# EAGLE board shiftmodule (EAGLE 6.3)
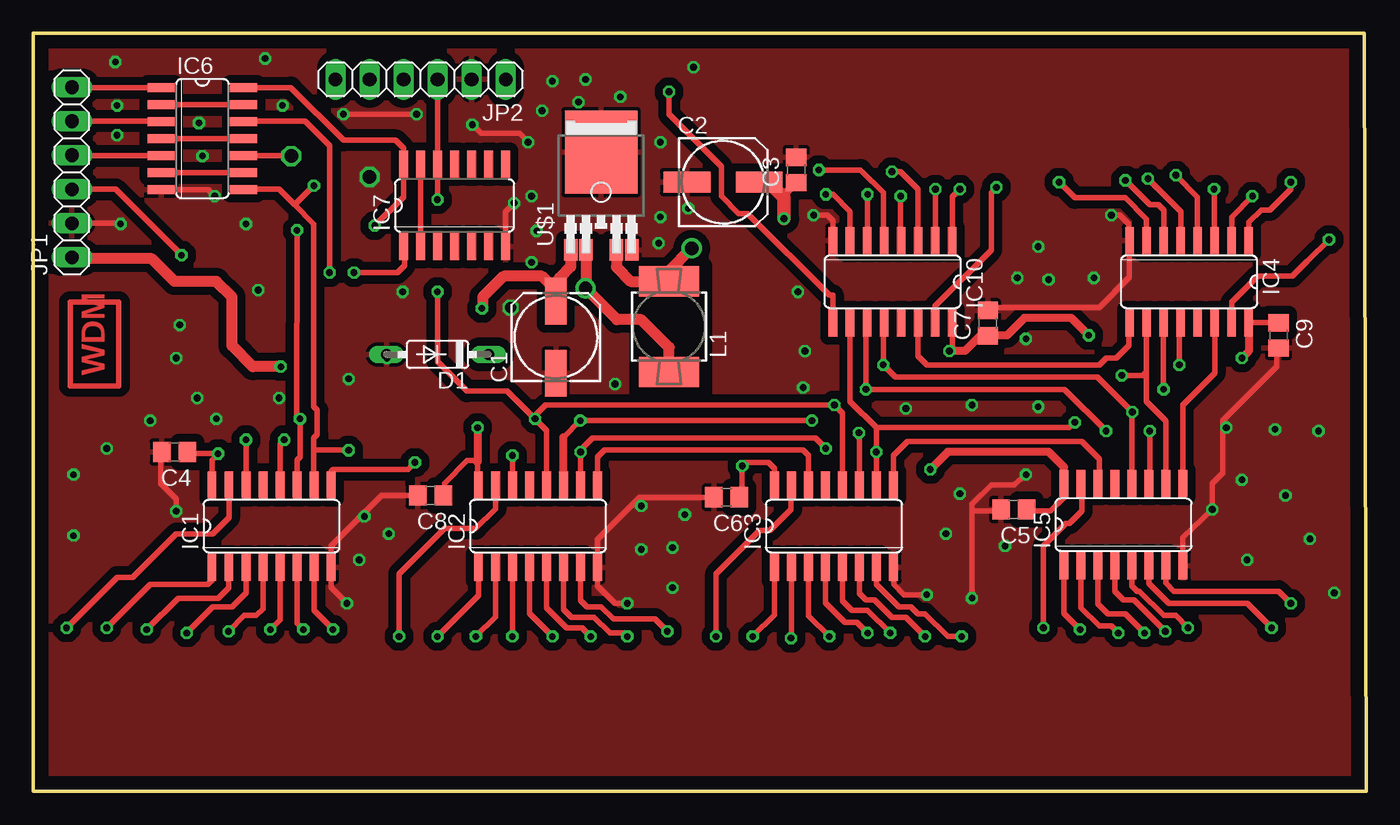
[diagram p0: board, top side]
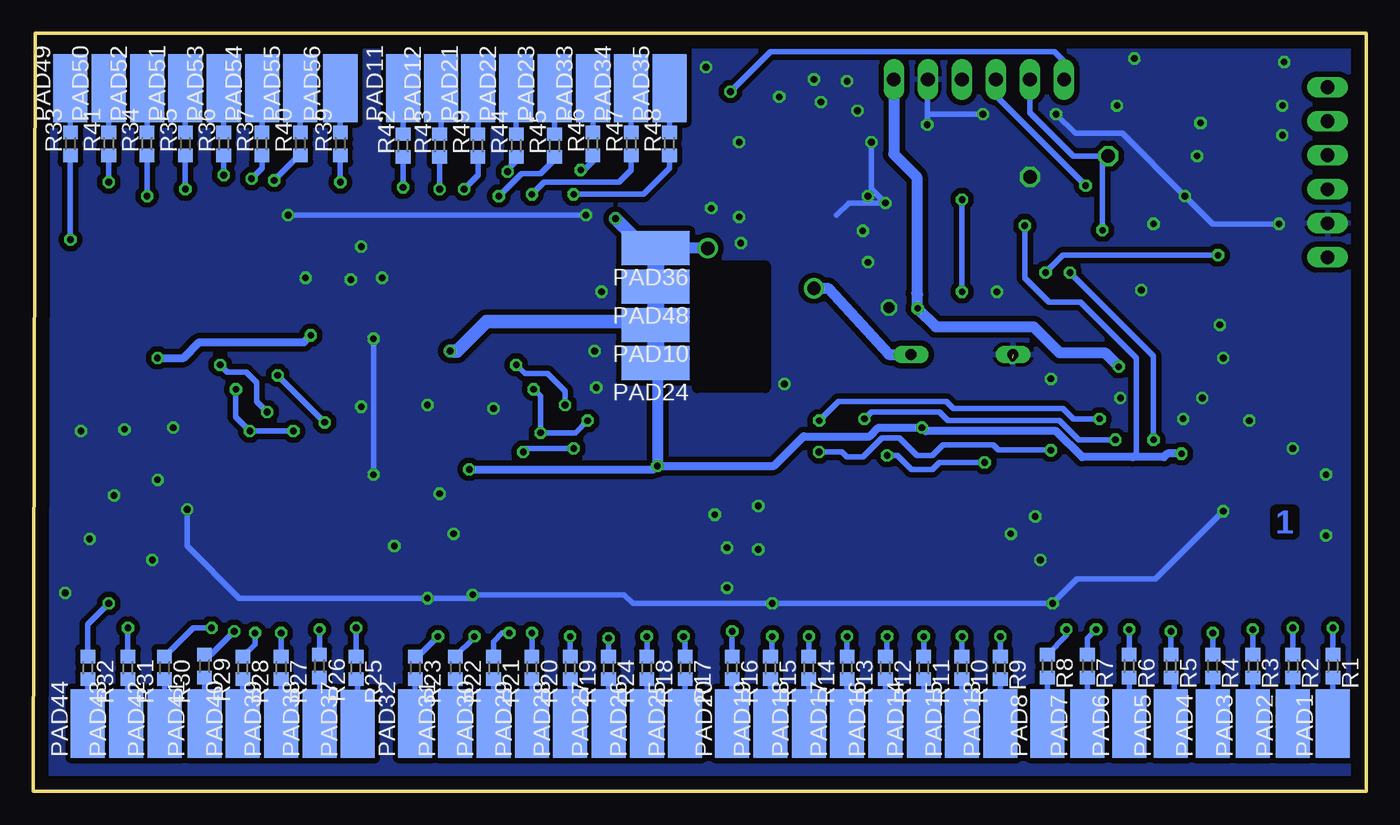
[diagram p1: board, bottom side, seen from below]

Size 99.48 x 56.6 mm. Coordinates in mm from the lower left corner, seen from the top.
Outline: 0,0 99.48,0 99.35,56.6 0,56.6 0,0
Copper layers (1*16): Top 0.035mm / dielectric 1.5mm / Bottom 0.035mm
Design rules "default *": minimum track width 10mil, minimum drill 24mil, track to track 8mil, track to pad 8mil, pad to pad 8mil, via to via 8mil, smd to smd 8mil, copper to edge 40mil, drill to drill 8mil, minimum pad ring 10mil, minimum via ring 8mil, stop-mask expansion 4mil, vias tented up to drill 20mil, thermal gap 10mil
tRestrict: area 45.1,30 to 50.1,39.3
bRestrict: area 44.9,30.2 to 49.9,39.3

## Footprints (pad centres in the part's own frame; a part is rotated, then mirrored left to right if it is on the bottom)
153CLV-0605 = smd 3.5 x 1.6: + 2.7,0; - -2.7,0
C0805 = smd 1.3 x 1.5: 1 -0.95,0; 2 0.95,0
DO35-7 = drill 0.813 long: A 3.81,0; C -3.81,0
SO16 = smd 0.66 x 2.032: 1 -4.445,-3.073; 2 -3.175,-3.073; 3 -1.905,-3.073; 4 -0.635,-3.073; 5 0.635,-3.073; 6 1.905,-3.073; 7 3.175,-3.073; 8 4.445,-3.073; 9 4.445,3.073; 10 3.175,3.073; 11 1.905,3.073; 12 0.635,3.073; 13 -0.635,3.073; 14 -1.905,3.073; 15 -3.175,3.073; 16 -4.445,3.073
SO14 = smd 0.66 x 2.032: 1 -3.81,-3.073; 2 -2.54,-3.073; 3 -1.27,-3.073; 4 0,-3.073; 5 1.27,-3.073; 6 2.54,-3.073; 7 3.81,-3.073; 8 3.81,3.073; 9 2.54,3.073; 10 1.27,3.073; 11 0,3.073; 12 -1.27,3.073; 13 -2.54,3.073; 14 -3.81,3.073
1X06 = drill 1.016 long: 1 -6.35,0; 2 -3.81,0; 3 -1.27,0; 4 1.27,0; 5 3.81,0; 6 6.35,0
MS85 = smd 4.5 x 2.25: 1 0,-3.383; 2 0,3.383
SMD2,54-5,08 = smd 2.54 x 5.08: 1 0,0
R0603 = smd 1 x 1.1: 1 -0.85,0; 2 0.85,0
TO252-5-11 = smd 1 x 1.6: 1 -2.28,-4.8; 2 -1.14,-4.8; 4 1.14,-4.8; 5 2.28,-4.8 | smd 5.4 x 6.2: 3 0,2.5

## Placement (x,y rotation side)
C1  [153CLV-0605]  39,33.93 90 top
C2  [153CLV-0605]  51.48,45.5 0 top
C3  [C0805]  56.94,46.41 90 top
C4  [C0805]  10.53,25.35 180 top
C5  [C0805]  73.19,21.06 180 top
C6  [C0805]  51.74,21.97 180 top
C7  [C0805]  71.24,34.97 90 top
C8  [C0805]  29.64,22.1 180 top
C9  [C0805]  92.95,34.06 270 top
D1  1N4148DO35-7  [DO35-7]  30.16,32.63 180 top
IC1  74LS595D  [SO16]  17.77,19.82 0 top
IC2  74LS595D  [SO16]  37.66,19.82 0 top
IC3  74LS595D  [SO16]  59.76,19.82 0 top
IC4  74LS595D  [SO16]  86.27,38.06 180 top
IC5  74LS595D  [SO16]  81.37,19.92 0 top
IC6  74HC04D  [SO14]  12.61,48.75 270 top
IC7  74HC04D  [SO14]  31.43,43.76 0 top
IC10  74LS595D  [SO16]  64.14,38.06 180 top
JP1  [1X06]  2.87,46.24 90 top
JP2  [1X06]  28.9,53.18 180 top
L1  [MS85]  47.45,34.71 0 top
PAD1  [SMD2,54-5,08]  2.47,5.07 0 bottom
PAD2  [SMD2,54-5,08]  5.46,5.07 0 bottom
PAD3  [SMD2,54-5,08]  8.45,5.07 0 bottom
PAD4  [SMD2,54-5,08]  11.44,5.07 0 bottom
PAD5  [SMD2,54-5,08]  14.56,5.07 0 bottom
PAD6  [SMD2,54-5,08]  17.68,5.07 0 bottom
PAD7  [SMD2,54-5,08]  20.8,5.07 0 bottom
PAD8  [SMD2,54-5,08]  23.79,5.07 0 bottom
PAD10  [SMD2,54-5,08]  53.04,34.84 90 bottom
PAD11  [SMD2,54-5,08]  71.89,52.52 0 bottom
PAD12  [SMD2,54-5,08]  69.06,52.5 0 bottom
PAD13  [SMD2,54-5,08]  27.3,5.07 0 bottom
PAD14  [SMD2,54-5,08]  33.02,5.07 0 bottom
PAD15  [SMD2,54-5,08]  30.16,5.07 0 bottom
PAD16  [SMD2,54-5,08]  35.88,5.07 0 bottom
PAD17  [SMD2,54-5,08]  38.74,5.07 0 bottom
PAD18  [SMD2,54-5,08]  41.6,5.07 0 bottom
PAD19  [SMD2,54-5,08]  44.46,5.07 0 bottom
PAD20  [SMD2,54-5,08]  47.32,5.07 0 bottom
PAD21  [SMD2,54-5,08]  66.3,52.52 0 bottom
PAD22  [SMD2,54-5,08]  63.44,52.52 0 bottom
PAD23  [SMD2,54-5,08]  60.58,52.52 0 bottom
PAD24  [SMD2,54-5,08]  53.04,31.98 90 bottom
PAD25  [SMD2,54-5,08]  50.83,5.07 0 bottom
PAD26  [SMD2,54-5,08]  53.69,5.07 0 bottom
PAD27  [SMD2,54-5,08]  56.55,5.07 0 bottom
PAD28  [SMD2,54-5,08]  59.41,5.07 0 bottom
PAD29  [SMD2,54-5,08]  62.27,5.07 0 bottom
PAD30  [SMD2,54-5,08]  65.13,5.07 0 bottom
PAD31  [SMD2,54-5,08]  67.99,5.07 0 bottom
PAD32  [SMD2,54-5,08]  70.98,5.07 0 bottom
PAD33  [SMD2,54-5,08]  57.72,52.52 0 bottom
PAD34  [SMD2,54-5,08]  54.86,52.52 0 bottom
PAD35  [SMD2,54-5,08]  52,52.52 0 bottom
PAD36  [SMD2,54-5,08]  53.04,40.56 90 bottom
PAD37  [SMD2,54-5,08]  75.29,5.05 0 bottom
PAD38  [SMD2,54-5,08]  78.13,5.07 0 bottom
PAD39  [SMD2,54-5,08]  80.99,5.07 0 bottom
PAD40  [SMD2,54-5,08]  83.85,5.07 0 bottom
PAD41  [SMD2,54-5,08]  86.71,5.07 0 bottom
PAD42  [SMD2,54-5,08]  89.7,5.07 0 bottom
PAD43  [SMD2,54-5,08]  92.56,5.07 0 bottom
PAD44  [SMD2,54-5,08]  95.42,5.07 0 bottom
PAD48  [SMD2,54-5,08]  53.04,37.7 90 bottom
PAD49  [SMD2,54-5,08]  96.72,52.52 0 bottom
PAD50  [SMD2,54-5,08]  93.86,52.52 0 bottom
PAD51  [SMD2,54-5,08]  88.14,52.52 0 bottom
PAD52  [SMD2,54-5,08]  91,52.52 0 bottom
PAD53  [SMD2,54-5,08]  85.28,52.52 0 bottom
PAD54  [SMD2,54-5,08]  82.42,52.52 0 bottom
PAD55  [SMD2,54-5,08]  79.56,52.52 0 bottom
PAD56  [SMD2,54-5,08]  76.57,52.52 0 bottom
R1  [R0603]  2.47,9.36 270 bottom
R2  [R0603]  5.46,9.36 270 bottom
R3  [R0603]  8.45,9.36 270 bottom
R4  [R0603]  11.44,9.36 270 bottom
R5  [R0603]  14.56,9.36 270 bottom
R6  [R0603]  17.68,9.36 270 bottom
R7  [R0603]  20.8,9.36 270 bottom
R8  [R0603]  23.79,9.36 270 bottom
R9  [R0603]  27.3,9.23 270 bottom
R10  [R0603]  30.16,9.23 270 bottom
R11  [R0603]  33.02,9.23 270 bottom
R12  [R0603]  35.88,9.23 270 bottom
R13  [R0603]  38.74,9.23 270 bottom
R14  [R0603]  41.6,9.23 270 bottom
R15  [R0603]  44.46,9.23 270 bottom
R16  [R0603]  47.32,9.23 270 bottom
R17  [R0603]  50.83,9.23 270 bottom
R18  [R0603]  53.69,9.23 270 bottom
R19  [R0603]  59.41,9.23 270 bottom
R20  [R0603]  62.27,9.23 270 bottom
R21  [R0603]  65.13,9.23 270 bottom
R22  [R0603]  67.99,9.23 270 bottom
R23  [R0603]  70.98,9.23 270 bottom
R24  [R0603]  56.55,9.23 270 bottom
R25  [R0603]  75.4,9.23 270 bottom
R26  [R0603]  78.13,9.36 270 bottom
R27  [R0603]  80.99,9.23 270 bottom
R28  [R0603]  83.85,9.23 270 bottom
R29  [R0603]  86.71,9.36 270 bottom
R30  [R0603]  89.7,9.23 270 bottom
R31  [R0603]  92.43,9.23 270 bottom
R32  [R0603]  95.42,9.23 270 bottom
R33  [R0603]  96.72,48.36 90 bottom
R34  [R0603]  91,48.36 90 bottom
R35  [R0603]  88.14,48.36 90 bottom
R36  [R0603]  85.28,48.36 90 bottom
R37  [R0603]  82.42,48.36 90 bottom
R39  [R0603]  76.57,48.36 90 bottom
R40  [R0603]  79.56,48.36 90 bottom
R41  [R0603]  93.86,48.36 90 bottom
R42  [R0603]  71.89,48.23 90 bottom
R43  [R0603]  69.16,48.23 90 bottom
R44  [R0603]  63.44,48.23 90 bottom
R45  [R0603]  60.58,48.23 90 bottom
R46  [R0603]  57.72,48.36 90 bottom
R47  [R0603]  54.86,48.36 90 bottom
R48  [R0603]  52,48.36 90 bottom
R49  [R0603]  66.3,48.23 90 bottom
U$1  AP1507  [TO252-5-11]  42.38,45.24 0 top

## Library data of the parts
C1-C9 R1-R37 R39-R49 = rcl
D1 = diode
IC1-IC5 IC10 = 74xx-us
IC6 IC7 = 74xx-eu
JP1 JP2 = pinhead
L1 = inductor-neosid; OC_FARNELL: unknown; OC_NEWARK: unknown
PAD1-PAD8 PAD10-PAD44 PAD48-PAD56 = wirepad
U$1 = misc

## Nets
GND: C1.- C2.- C3.2 C4.2 C5.2 C6.2 C7.2 C8.2 C9.2 D1.A IC1.8 IC2.8 IC3.8 IC4.8 IC5.8 IC6.7 IC7.7 IC10.8 JP1.2 JP2.2 U$1.3 U$1.5
N$1: IC6.2 IC6.13
N$2: IC2.9 IC3.14
N$3: IC3.9 IC5.14
N$4: IC10.9 JP2.6
N$5: IC6.4 IC6.11
N$6: IC6.6 IC6.9
N$7: IC6.1 JP1.6
N$8: IC6.3 JP1.5
N$9: IC6.5 JP1.4
N$10: IC7.1 JP1.3
N$12: PAD1.1 R1.2
N$13: PAD2.1 R2.2
N$14: PAD3.1 R3.2
N$15: IC4.14 IC5.9
N$16: PAD4.1 R4.2
N$17: PAD5.1 R5.2
N$18: PAD6.1 R6.2
N$19: PAD7.1 R7.2
N$20: PAD8.1 R8.2
N$21: PAD13.1 R9.2
N$22: PAD15.1 R10.2
N$23: PAD14.1 R11.2
N$24: PAD16.1 R12.2
N$25: PAD17.1 R13.2
N$26: PAD18.1 R14.2
N$27: PAD19.1 R15.2
N$28: PAD20.1 R16.2
N$29: PAD25.1 R17.2
N$30: PAD26.1 R18.2
N$31: PAD28.1 R19.2
N$32: PAD29.1 R20.2
N$33: PAD30.1 R21.2
N$34: PAD31.1 R22.2
N$35: PAD32.1 R23.2
N$36: PAD27.1 R24.2
N$37: PAD37.1 R25.2
N$38: PAD38.1 R26.2
N$39: PAD39.1 R27.2
N$40: PAD40.1 R28.2
N$41: PAD41.1 R29.2
N$42: PAD42.1 R30.2
N$43: PAD43.1 R31.2
N$44: PAD44.1 R32.2
N$45: PAD49.1 R33.2
N$46: PAD52.1 R34.2
N$47: PAD51.1 R35.2
N$48: PAD53.1 R36.2
N$49: PAD54.1 R37.2
N$50: PAD56.1 R39.2
N$51: PAD55.1 R40.2
N$52: PAD50.1 R41.2
N$53: IC1.9 IC2.14
N$54: IC7.2 IC7.13
N$55: IC4.9 IC10.14
N$56: PAD11.1 R42.2
N$57: PAD12.1 R43.2
N$58: PAD22.1 R44.2
N$59: PAD23.1 R45.2
N$60: PAD33.1 R46.2
N$61: PAD34.1 R47.2
N$62: PAD35.1 R48.2
N$63: PAD21.1 R49.2
N$64: D1.C L1.1 U$1.2
N$65: IC4.7 R39.1
N$66: IC4.5 R37.1
N$67: IC4.6 R40.1
N$68: IC4.4 R36.1
N$69: IC4.3 R35.1
N$70: IC4.2 R34.1
N$71: IC4.1 R41.1
N$72: IC4.15 R33.1
N$73: IC10.15 R42.1
N$74: IC10.1 R43.1
N$75: IC10.2 R49.1
N$76: IC10.3 R44.1
N$77: IC10.4 R45.1
N$78: IC10.5 R46.1
N$79: IC10.6 R47.1
N$80: IC10.7 R48.1
N$81: IC5.7 R32.1
N$82: IC5.6 R31.1
N$83: IC5.5 R30.1
N$84: IC5.4 R29.1
N$85: IC5.3 R28.1
N$86: IC5.2 R27.1
N$87: IC5.1 R26.1
N$88: IC5.15 R25.1
N$89: IC3.7 R23.1
N$90: IC3.6 R22.1
N$91: IC3.5 R21.1
N$92: IC3.4 R20.1
N$93: IC3.3 R19.1
N$94: IC3.2 R24.1
N$95: IC3.1 R18.1
N$96: IC3.15 R17.1
N$97: IC2.7 R16.1
N$98: IC2.6 R15.1
N$99: IC2.5 R14.1
N$100: IC2.4 R13.1
N$101: IC2.3 R12.1
N$102: IC2.2 R11.1
N$103: IC2.1 R10.1
N$104: IC2.15 R9.1
N$105: IC1.15 R1.1
N$106: IC1.1 R2.1
N$107: IC1.7 R8.1
N$108: IC1.6 R7.1
N$109: IC1.5 R6.1
N$110: IC1.4 R5.1
N$111: IC1.3 R4.1
N$112: IC1.2 R3.1
RCK: IC1.12 IC2.12 IC3.12 IC4.12 IC5.12 IC7.12 IC10.12 JP2.3
SCK: IC1.11 IC2.11 IC3.11 IC4.11 IC5.11 IC6.10 IC10.11 JP2.5
SCL: IC1.10 IC2.10 IC3.10 IC4.10 IC5.10 IC6.8 IC10.10 JP2.4
SER: IC1.14 IC6.12
VCC: C2.+ C3.1 C4.1 C5.1 C6.1 C7.1 C8.1 C9.1 IC1.16 IC2.16 IC3.16 IC4.16 IC5.16 IC6.14 IC7.14 IC10.16 L1.2 PAD10.1 PAD24.1 PAD36.1 PAD48.1 U$1.4
VIN: C1.+ JP1.1 JP2.1 U$1.1

## Tracks (layer width: path | path; a pad name or v marks a point on that pad's centre or on a via)
GND  (via drill 0.5, 0.8, 1)  (1 unrouted)
  Top 0.406: v23.4,14.04 22.21,15.22 IC1.8 22.23,16.76 22.23,18.33 26,22.1 C8.2 | v44.33,14.04 43.42,14.04 42.12,15.34 42.12,16.73 IC2.8 42.11,18.84 45.24,21.97 C6.2 | v66.69,14.69 65,14.69 64.22,15.47 64.22,16.73 IC3.8 | IC5.8 85.81,18.96 v88.01,21.06 88.01,23.01 88.79,23.79 88.79,27.69 92.82,31.72 92.82,32.98 C9.2 | IC10.8 59.7,42.62 59.28,43.03 v58.24,43.03 | v80.47,43.03 81.12,43.03 81.77,42.38 81.77,41.19 IC4.8 81.82,38.41 79.56,36.14 71.46,36.14 C7.2 | IC7.7 35.24,43.3 v35.88,43.94 | v23.14,50.57 v28.6,50.57 | IC6.7 13.04,44.94 v13.52,44.46 | v74.1,23.66 73.19,22.88 71.5,22.88 70.07,21.45 70.07,20.93 | 70.07,20.93 v70.07,14.43 | C5.2 72.11,20.93 70.07,20.93 | C4.2 9.49,25.26 9.49,23.01 10.66,21.84 v10.66,20.93 | JP1.2 6.45,42.43 v6.5,42.38 | v32.76,49.79 33.41,49.14 36.27,49.14 v36.92,48.49
  Bottom 0.406: v88.01,21.06 88.01,18.33 84.11,14.43 v70.07,14.43 66.95,14.43 v66.69,14.69 55.38,14.69 54.73,14.04 v44.33,14.04 v23.4,14.04 21.58,15.86 15.73,15.86 v10.66,20.93 | v58.24,43.03 v80.47,43.03 | 39.52,43.03 38.61,43.94 v35.88,43.94 | v32.76,49.79 32.76,50.57 | 32.76,50.57 32.76,52.52 32.63,52.65 32.63,53.1 JP2.2 | v23.14,50.57 21.71,49.14 18.2,49.14 v13.52,44.46 11.44,42.38 v6.5,42.38 | v28.6,50.57 32.76,50.57 | v74.1,33.8 v74.1,23.66 | v36.92,48.49 36.92,44.98 36.01,44.07
  other vias: 27.56,37.31 17.29,54.73 25.09,45.89 35.62,36.14 13.65,27.82 2.99,19.11 93.47,22.1 79.17,38.35 48.88,43.55 41.21,53.17 70.07,28.86 10.66,32.37 26.39,32.37 37.18,44.46 37.96,50.83 43.81,51.87 46.8,48.49 46.8,42.9 57.46,30.16 57.59,32.89 57.07,37.31 43.42,30.42 37.18,39.52 49.27,54.08 40.69,51.48 38.74,53.04 37.57,41.86 46.67,40.95 75.01,40.69 73.45,38.35 75.79,38.22 95.94,26.91 92.69,27.04 90.22,23.27 89.05,27.17 95.29,18.85 97.11,14.82 90.61,17.29 72.54,18.33 68.12,19.24 69.16,22.23 45.37,21.32 48.62,20.67 47.71,18.2 45.37,18.07 47.71,15.21 26.52,19.24 24.7,20.54 24.31,17.29 2.99,23.66 5.46,25.61 8.71,27.69 12.22,29.38 10.92,34.84 16.77,37.44 15.86,42.38 6.11,54.47 6.24,51.22 6.24,49.01 12.35,49.92 12.61,47.45 18.59,51.22 23.53,30.81 18.33,29.38 75.01,28.73 65.13,28.6
  pour Top (isolate 0.61): -6.89,59.41 109.2,59.41 109.2,-1.04 -7.15,-1.17 -7.02,57.33
  pour Bottom (isolate 0.406): -0.65,64.09 99.19,64.09 99.71,-7.8 -0.13,-7.8
N$1
  Top 0.406: IC6.2 IC6.13
N$2
  Top 0.406: IC3.14 57.86,25.09 57.46,25.48 42.64,25.48 42.12,24.96 42.12,22.91 IC2.9
N$3
  Top 0.406: IC3.9 64.2,25.07 65.26,26.13 78.26,26.13 79.56,24.83 79.56,23.09 IC5.14
N$4  (via drill 0.5)
  Top 0.406: v47.45,52.26 47.45,50.57 51.35,46.67 51.35,44.46 52.65,43.16 53.3,43.16 59.41,37.05 59.67,37.05 59.67,35.01 IC10.9
  Bottom 0.406: JP2.6 22.55,54.53 23.27,55.25 44.46,55.25 v47.45,52.26
N$5
  Top 0.406: IC6.11 IC6.4
N$6
  Top 0.406: IC6.6 IC6.9
N$7
  Top 0.406: JP1.6 2.9,52.56 IC6.1
N$8
  Top 0.406: IC6.3 9.51,50.05 JP1.5
N$9
  Top 0.406: JP1.4 2.9,47.48 IC6.5
N$10  (via drill 0.5)
  Top 0.406: JP1.3 6.12,44.97 v11.05,40.04 | v23.92,38.74 27.17,38.74 27.69,39.26 27.69,40.62 IC7.1
  Bottom 0.406: v11.05,40.04 22.62,40.04 v23.92,38.74
N$11
  Top 0.406: 2.73,36.53 6.37,36.53 6.37,30.29 2.73,30.29 2.73,36.53
N$12
  Bottom 0.406: R1.2 PAD1.1
N$13
  Bottom 0.406: PAD2.1 R2.2
N$14
  Bottom 0.406: R3.2 PAD3.1
N$15
  Top 0.406: IC5.9 85.81,28.88 88.17,31.23 IC4.14
N$16
  Bottom 0.406: PAD4.1 R4.2
N$17
  Bottom 0.406: R5.2 14.3,8.51 14.3,4.42 14.56,4.42 PAD5.1
N$18
  Bottom 0.406: PAD6.1 R6.2
N$19
  Bottom 0.406: R7.2 PAD7.1
N$20
  Bottom 0.406: PAD8.1 R8.2
N$21
  Bottom 0.406: PAD13.1 R9.2
N$22
  Bottom 0.406: R10.2 30.16,5.33 30.68,4.81 30.42,4.81 PAD15.1
N$23
  Bottom 0.406: PAD14.1 R11.2
N$24
  Bottom 0.406: PAD16.1 R12.2
N$25
  Bottom 0.406: PAD17.1 R13.2
N$26
  Bottom 0.406: PAD18.1 R14.2
N$27
  Bottom 0.406: PAD19.1 R15.2
N$28
  Bottom 0.406: PAD20.1 R16.2
N$29
  Bottom 0.406: R17.2 PAD25.1
N$30
  Bottom 0.406: PAD26.1 R18.2
N$31
  Bottom 0.406: PAD28.1 R19.2
N$32
  Bottom 0.406: R20.2 PAD29.1
N$33
  Bottom 0.406: PAD30.1 R21.2
N$34
  Bottom 0.406: R22.2 PAD31.1
N$35
  Bottom 0.406: R23.2 PAD32.1
N$36
  Bottom 0.406: R24.2 PAD27.1
N$37
  Bottom 0.406: PAD37.1 75.29,8.27 R25.2
N$38
  Bottom 0.406: R26.2 PAD38.1
N$39
  Bottom 0.406: R27.2 PAD39.1
N$40
  Bottom 0.406: R28.2 PAD40.1
N$41
  Bottom 0.406: R29.2 PAD41.1 | PAD41.1 86.71,4.81 86.97,4.55 86.97,4.81 PAD41.1
N$42
  Bottom 0.406: PAD42.1 R30.2
N$43
  Bottom 0.406: R31.2 92.43,5.2 PAD43.1
N$44
  Bottom 0.406: PAD44.1 R32.2
N$45
  Bottom 0.406: PAD49.1 R33.2
N$46
  Bottom 0.406: PAD52.1 R34.2
N$47
  Bottom 0.406: PAD51.1 R35.2
N$48
  Bottom 0.406: PAD53.1 R36.2
N$49
  Bottom 0.406: PAD54.1 R37.2
N$50
  Bottom 0.406: PAD56.1 R39.2
N$51
  Bottom 0.406: R40.2 PAD55.1
N$52
  Bottom 0.406: R41.2 PAD50.1
N$53  (via drill 0.5)
  Top 0.406: IC1.9 22.21,23.91 22.36,24.05 27.95,24.05 v28.47,24.57 | v35.75,25.09 IC2.14
  Bottom 0.406: v28.47,24.57 31.85,24.57 32.37,24.05 33.93,24.05 34.97,25.09 v35.75,25.09
N$54
  Top 0.406: IC7.2 IC7.13
N$55
  Top 0.406: IC10.14 66.04,33.02 66.04,32.5 66.69,31.85 79.56,31.85 80.08,32.37 80.86,32.37 81.77,33.28 81.77,34.58 81.9,34.71 81.82,34.78 IC4.9
N$56
  Bottom 0.406: R42.2 PAD11.1
N$57
  Bottom 0.406: PAD12.1 69.06,49.18 R43.2
N$58
  Bottom 0.406: PAD22.1 R44.2
N$59
  Bottom 0.406: R45.2 PAD23.1
N$60
  Bottom 0.406: PAD33.1 R46.2
N$61
  Bottom 0.406: R47.2 PAD34.1
N$62
  Bottom 0.406: PAD35.1 R48.2
N$63
  Bottom 0.406: R49.2 PAD21.1
N$64  (via drill 1)
  Top 0.813: U$1.2 41.24,37.6 v41.21,37.57 43.55,35.23 45.37,35.23 47.45,33.15 L1.1
  Bottom 0.813: v41.21,37.57 40.17,37.57 35.62,32.63 D1.C
N$65  (via drill 0.5)
  Top 0.406: IC4.7 83.09,42.74 81.51,44.33 77.74,44.33 v76.57,45.5
  Bottom 0.406: v76.57,45.5 R39.1
N$66  (via drill 0.5)
  Top 0.406: v83.2,45.76 85.67,43.29 85.67,41.17 IC4.5
  Bottom 0.406: R37.1 82.42,46.54 v83.2,45.76
N$67  (via drill 0.5)
  Top 0.406: v81.51,45.63 83.33,43.81 83.98,43.81 84.37,43.42 IC4.6
  Bottom 0.406: R40.1 79.63,47.51 v81.51,45.63
N$68  (via drill 0.5)
  Top 0.406: IC4.4 86.91,44.4 v85.28,46.02
  Bottom 0.406: v85.28,46.02 R36.1
N$69  (via drill 0.5)
  Top 0.406: v88.14,44.98 88.14,41.17 IC4.3
  Bottom 0.406: R35.1 v88.14,44.98
N$70  (via drill 0.5)
  Top 0.406: IC4.2 89.44,42.91 v91,44.46
  Bottom 0.406: v91,44.46 R34.1
N$71  (via drill 0.5)
  Top 0.406: v93.86,45.5 93.86,44.98 92.3,43.42 91.65,43.42 90.74,42.51 90.74,41.16 IC4.1
  Bottom 0.406: R41.1 v93.86,45.5
N$72  (via drill 0.5)
  Top 0.406: IC4.15 89.44,36.53 91.39,38.48 93.99,38.48 95.09,39.59 v96.72,41.21
  Bottom 0.406: R33.1 v96.72,41.21
N$73  (via drill 0.5)
  Top 0.406: IC10.15 67.31,36.24 71.5,40.43 71.5,44.72 v71.89,45.11
  Bottom 0.406: v71.89,45.11 R42.1
N$74  (via drill 0.5)
  Top 0.406: IC10.1 68.58,44.41 v69.16,44.98
  Bottom 0.406: v69.16,44.98 R43.1
N$75  (via drill 0.5)
  Top 0.406: v67.34,44.98 67.34,41.16 IC10.2
  Bottom 0.406: R49.1 66.3,46.02 v67.34,44.98
N$76  (via drill 0.5)
  Top 0.406: v64.09,46.28 64.74,46.28 66.04,44.98 IC10.3
  Bottom 0.406: R44.1 63.44,47.06 64.22,46.28 v64.09,46.28
N$77  (via drill 0.5)
  Top 0.406: v64.74,44.46 64.74,41.17 IC10.4
  Bottom 0.406: R45.1 60.58,47.19 61.62,46.15 63.05,46.15 v64.74,44.46
N$78  (via drill 0.5)
  Top 0.406: v58.63,46.41 61.75,46.41 63.44,44.72 63.44,41.2 IC10.5
  Bottom 0.406: R46.1 57.72,47.06 58.37,46.41 v58.63,46.41
N$79  (via drill 0.5)
  Top 0.406: v62.27,44.59 62.27,41.17 IC10.6
  Bottom 0.406: R47.1 54.86,46.41 55.77,45.5 61.36,45.5 v62.27,44.59
N$80  (via drill 0.5)
  Top 0.406: v59.15,44.59 59.67,44.59 60.97,43.29 IC10.7
  Bottom 0.406: R48.1 52,46.54 53.95,44.59 v59.15,44.59
N$81  (via drill 0.5)
  Top 0.406: IC5.7 84.54,15.55 85.15,14.95 92.95,14.95 v93.86,14.04
  Bottom 0.406: v93.86,14.04 95.42,12.48 R32.1
N$82  (via drill 0.5)
  Top 0.406: IC5.6 83.27,15.53 84.76,14.04 90.61,14.04 v92.43,12.22
  Bottom 0.406: v92.43,12.22 R31.1
N$83  (via drill 0.5)
  Top 0.406: IC5.5 82,15.37 82.42,14.95 82.55,14.95 84.37,13.13 85.28,13.13 v86.19,12.22
  Bottom 0.406: v86.19,12.22 87.56,12.22 R30.1
N$84  (via drill 0.5)
  Top 0.406: v84.5,11.96 82.16,14.3 81.38,14.3 80.73,14.95 IC5.4
  Bottom 0.406: R29.1 86.25,10.21 v84.5,11.96
N$85  (via drill 0.5)
  Top 0.406: IC5.3 79.46,14.01 80.21,13.26 81.51,13.26 v82.94,11.83
  Bottom 0.406: v82.94,11.83 82.94,10.99 R28.1
N$86  (via drill 0.5)
  Top 0.406: IC5.2 78.19,13.71 79.56,12.35 80.47,12.35 v80.99,11.83
  Bottom 0.406: v80.99,11.83 R27.1
N$87  (via drill 0.5)
  Top 0.406: IC5.1 76.92,13.29 v78.13,12.09
  Bottom 0.406: v78.13,12.09 R26.1
N$88  (via drill 0.5)
  Top 0.406: v75.4,12.22 75.4,18.33 77.09,20.02 77.35,20.02 78.26,20.93 78.26,22.93 IC5.15
  Bottom 0.406: R25.1 v75.4,12.22
N$89  (via drill 0.5)
  Top 0.406: v69.29,11.57 68.25,11.57 66.56,13.26 66.04,13.26 65.52,13.78 64.61,13.78 62.92,15.47 62.92,16.73 IC3.7
  Bottom 0.406: R23.1 70.78,10.08 v69.29,11.57
N$90  (via drill 0.5)
  Top 0.406: IC3.6 61.66,14.78 62.14,14.3 62.79,14.3 64.09,13 65.13,13 v66.56,11.57
  Bottom 0.406: v66.56,11.57 66.56,11.51 R22.1
N$91  (via drill 0.5)
  Top 0.406: IC3.5 60.4,14.22 61.1,13.52 62.27,13.52 v63.96,11.83
  Bottom 0.406: v63.96,11.83 64.48,11.83 65.13,11.18 R21.1
N$92  (via drill 0.5)
  Top 0.406: IC3.4 59.12,14.06 60.58,12.61 61.49,12.61 v62.27,11.83
  Bottom 0.406: v62.27,11.83 R20.1
N$93  (via drill 0.5)
  Top 0.406: IC3.3 57.86,13.12 v59.41,11.57
  Bottom 0.406: v59.41,11.57 R19.1
N$94  (via drill 0.5)
  Top 0.406: IC3.2 56.59,11.47 v56.55,11.44
  Bottom 0.406: v56.55,11.44 R24.1
N$95  (via drill 0.5)
  Top 0.406: IC3.1 55.32,13.2 v53.69,11.57
  Bottom 0.406: v53.69,11.57 R18.1
N$96  (via drill 0.5)
  Top 0.406: v50.96,11.57 50.96,16.25 54.21,19.5 54.99,19.5 56.55,21.06 56.55,22.86 IC3.15
  Bottom 0.406: R17.1 50.83,11.44 v50.96,11.57
N$97  (via drill 0.5)
  Top 0.406: IC2.7 40.84,14.29 41.34,13.78 42.38,13.78 43.29,12.87 46.41,12.87 v47.32,11.96
  Bottom 0.406: v47.32,11.96 R16.1
N$98  (via drill 0.5)
  Top 0.406: IC2.6 39.57,13.61 40.17,13 41.86,13 43.03,11.83 44.07,11.83 v44.33,11.57
  Bottom 0.406: v44.33,11.57 44.33,10.21 R15.1
N$99  (via drill 0.5)
  Top 0.406: IC2.5 38.3,13.71 39.78,12.22 40.95,12.22 v41.6,11.57
  Bottom 0.406: v41.6,11.57 R14.1
N$100  (via drill 0.5)
  Top 0.406: IC2.4 37.02,13.29 v38.74,11.57
  Bottom 0.406: v38.74,11.57 R13.1
N$101  (via drill 0.5)
  Top 0.406: IC2.3 35.76,12.62 v35.75,11.57
  Bottom 0.406: v35.75,11.57 35.75,10.21 R12.1
N$102  (via drill 0.5)
  Top 0.406: IC2.2 34.48,13.04 v33.02,11.57
  Bottom 0.406: v33.02,11.57 R11.1
N$103  (via drill 0.5)
  Top 0.406: IC2.1 33.22,14.62 v30.16,11.57
  Bottom 0.406: v30.16,11.57 R10.1
N$104  (via drill 0.5)
  Top 0.406: IC2.15 34.48,21.09 33.02,19.63 30.68,19.63 27.3,16.25 v27.3,11.57
  Bottom 0.406: v27.3,11.57 R9.1
N$105  (via drill 0.5)
  Top 0.406: IC1.15 14.59,20.45 13.39,19.24 10.66,19.24 7.41,15.99 6.24,15.99 v2.47,12.22
  Bottom 0.406: v2.47,12.22 R1.1
N$106  (via drill 0.5)
  Top 0.406: IC1.1 13.32,15.79 13,15.47 8.71,15.47 v5.46,12.22
  Bottom 0.406: v5.46,12.22 R2.1
N$107  (via drill 0.5)
  Top 0.406: IC1.7 20.95,13.51 v22.36,12.09
  Bottom 0.406: v22.36,12.09 22.36,11.64 R8.1
N$108  (via drill 0.5)
  Top 0.406: v20.15,12.09 19.68,12.56 IC1.6
  Bottom 0.406: R7.1 20.8,11.44 v20.15,12.09
N$109  (via drill 0.5)
  Top 0.406: v17.68,12.09 18.41,12.81 IC1.5
  Bottom 0.406: R6.1 v17.68,12.09
N$110  (via drill 0.5)
  Top 0.406: v14.56,11.96 15.73,13.13 16.64,13.13 17.14,13.62 IC1.4
  Bottom 0.406: R5.1 v14.56,11.96
N$111  (via drill 0.5)
  Top 0.406: v11.44,11.83 13.39,13.78 14.82,13.78 15.87,14.82 IC1.3
  Bottom 0.406: R4.1 v11.44,11.83
N$112  (via drill 0.5)
  Top 0.406: IC1.2 14.56,16.71 14.56,15.21 13.78,14.43 10.79,14.43 v8.45,12.09
  Bottom 0.406: v8.45,12.09 R3.1
RCK  (via drill 0.5)
  Top 0.406: JP2.3 30.17,47.62 IC7.12 v30.16,44.2 | IC5.12 82,28.32 v82.03,28.34 79.43,30.94 64.35,30.94 v63.44,31.85 63.44,34.84 63.51,34.91 | v85.54,31.85 85.54,34.89 IC4.12 | IC3.12 60.4,28.27 v59.8,28.86 38.22,28.86 37.44,28.08 v37.44,27.82 | 63.51,34.91 63.57,34.97 | IC1.12 18.41,25.95 v18.72,26.26 | IC2.12 38.3,26.96 v37.44,27.82 | v37.44,27.82 35.36,29.9 32.37,29.9 30.16,32.11 v30.16,37.31 | IC10.12 63.51,34.91
  Bottom 0.406: v82.03,28.34 82.81,29.12 82.81,30.55 83.59,31.33 85.02,31.33 v85.54,31.85 | v59.8,28.86 59.8,29.9 61.1,31.2 62.79,31.2 v63.44,31.85 | v18.72,26.26 21.45,26.26 22.88,27.69 31.2,27.69 31.85,28.34 36.92,28.34 v37.44,27.82 | v30.16,44.2 v30.16,37.31
SCK  (via drill 0.5, 1)
  Top 0.406: IC6.10 19.21,47.48 v19.24,47.45 | IC1.11 19.68,24.75 19.89,24.96 v19.89,27.82 19.63,28.08 v19.68,41.91 | IC4.11 v84.36,30.04 v84.37,30.03 | v83.33,26.91 83.33,23.05 IC5.11 | IC3.11 61.66,26.73 v61.62,26.78 | IC10.11 62.14,34.89 v62.14,30.03 76.96,30.03 v80.08,26.91 | 39.57,26.43 v40.82,27.69 v58.11,27.69
  Top 0.61: IC2.11 39.57,26.43
  Bottom 0.406: JP2.5 25.09,50.7 21.84,47.45 v19.24,47.45 19.68,47.02 v19.68,41.91 | v84.37,30.03 84.37,27.95 v83.33,26.91 v80.08,26.91 | v62.14,30.03 61.62,29.51 v61.62,26.78 59.02,26.78 v58.11,27.69 | v19.89,27.82 21.84,27.82 22.62,28.6 30.81,28.6 31.33,29.12 39.39,29.12 v40.82,27.69
SCL  (via drill 0.5)
  Top 0.406: IC1.10 20.93,22.91 20.93,25.48 | 19.5,43.81 20.93,42.38 20.93,28.73 21.19,28.47 21.19,26.65 20.93,26.39 20.93,25.48 | 19.5,43.81 18.33,44.98 15.72,44.98 IC6.8 | v20.93,45.24 19.5,43.81 | IC5.10 84.54,27.64 83.07,29.12 83.07,31.33 | 83.07,31.33 83.07,34.96 IC4.10 | IC10.10 60.97,29.12 62.92,27.17 | 62.92,27.17 v62.92,25.35 62.92,22.91 IC3.10 | 62.92,27.17 77.35,27.17 v77.74,27.56 | v81.25,31.07 82.81,31.07 83.07,31.33 | IC2.10 v40.84,25.35 40.84,25.5 41.73,26.39 58.37,26.39 v59.15,25.61 | 20.93,25.48 v23.53,25.48
  Bottom 0.406: JP2.4 27.63,51.94 v20.93,45.24 | v77.74,27.56 v81.25,31.07 | v59.15,25.61 62.66,25.61 v62.92,25.35 | v23.53,25.48 27.43,25.48 27.82,25.87 31.59,25.87 32.37,25.09 33.54,25.09 34.84,26.39 36.14,26.39 37.57,24.96 38.74,24.96 39.13,25.35 v40.84,25.35
SER  (via drill 0.5)
  Top 0.406: IC6.12 15.71,50.05 20.28,50.05 22.1,48.23 v22.1,38.74 | v15.86,26.26 v15.87,26.25 IC1.14
  Bottom 0.406: v15.86,26.26 15.86,32.5 v22.1,38.74
VCC  (via drill 0.5, 1)
  Top 0.406: IC1.16 13.32,24.77 v13.78,25.22 11.61,25.22 C4.1 | IC2.16 33.15,22.96 33.15,24.57 33.02,24.7 32.37,24.7 30.68,23.01 30.68,22.1 C8.1 | IC6.14 19.2,52.56 23.14,48.62 27.04,48.62 27.62,48.04 IC7.14 27.62,44.39 v25.48,42.25 | IC3.16 55.32,24.11 54.86,24.57 53.17,24.57 v52.91,24.31 52.91,22.19 C6.1 | IC10.16 68.58,33.09 | C5.1 74.27,20.93 75.92,20.93 76.96,21.97 76.96,22.88 76.92,22.88 IC5.16 | IC10.16 68.64,35.04 | C7.1 71.07,34.19 | 68.64,34.19 68.64,34.97 68.58,34.97 IC10.16 | C9.1 90.74,35.01 IC4.16
  Top 0.61: v33.15,27.17 33.15,24.57 | IC5.16 76.92,24.21 75.79,25.35 68.25,25.35 v66.95,24.05 | 68.58,33.09 v68.38,32.89 69.55,32.89 70.85,34.19 71.07,34.19 | IC4.16 90.71,32.87 v90.22,32.37 | v78.78,34.06 77.48,35.36 73.97,35.36 72.67,34.06 71.28,34.06 C7.1 | 56.03,44.33 56.03,44.55 C3.1
  Top 0.813: U$1.4 43.52,39.16 44.59,38.09 L1.2 47.45,38.87 v49.14,40.56
  Top 1.016: v56.03,42.77 56.03,44.33 54.86,45.5 C2.+
  Bottom 0.406: v25.48,42.25 25.48,38.35 23.66,36.53 21.32,36.53 17.16,32.37 17.16,25.22 17.42,24.96 | 53.17,24.05 v52.91,24.31
  Bottom 0.61: v13.78,25.22 14.82,25.22 15.08,24.96 17.42,24.96 21.19,24.96 23.14,26.91 32.89,26.91 v33.15,27.17 36.4,27.17 37.05,26.52 41.99,26.52 44.2,24.31 v52.91,24.31 | 53.17,24.05 v66.95,24.05 67.08,24.18 | v90.22,32.37 88.27,32.37 87.1,33.54 79.3,33.54 v78.78,34.06
  Bottom 0.813: PAD24.1 52.91,31.85 v52.91,24.31 | v49.14,40.56 PAD36.1
  Bottom 1.016: PAD36.1 53.82,40.56 v56.03,42.77 | v68.38,32.89 67.86,32.89 65.65,35.1 53.04,35.1 52.91,35.23
  Bottom 1.27: PAD36.1 PAD48.1 53.04,35.1 PAD10.1 PAD24.1
VIN  (via drill 0.5)
  Top 0.813: v18.46,31.72 16.38,31.72 14.82,33.28 14.82,36.92 13.65,38.09 10.53,38.09 8.84,39.78 2.98,39.78 JP1.1 | U$1.1 40.1,39.19 39.26,38.35 39.26,37.15 C1.+ 39,37.44 37.96,38.48 35.1,38.48 33.54,36.92 33.54,36.14 v33.48,36.08
  Bottom 0.813: JP2.1 35.25,47.6 33.54,45.89 33.54,37.18 | 33.54,37.18 33.54,36.14 v33.48,36.08 | v33.48,36.08 32.11,34.71 24.83,34.71 22.88,32.76 19.5,32.76 v18.46,31.72 | v33.48,36.08 33.48,37.12 33.54,37.18

## Text on the board
Top: WDM
Bottom: 1